# EAGLE board RespeakerCorev1.0_BRD (EAGLE 7.3.0), part 1 of 2
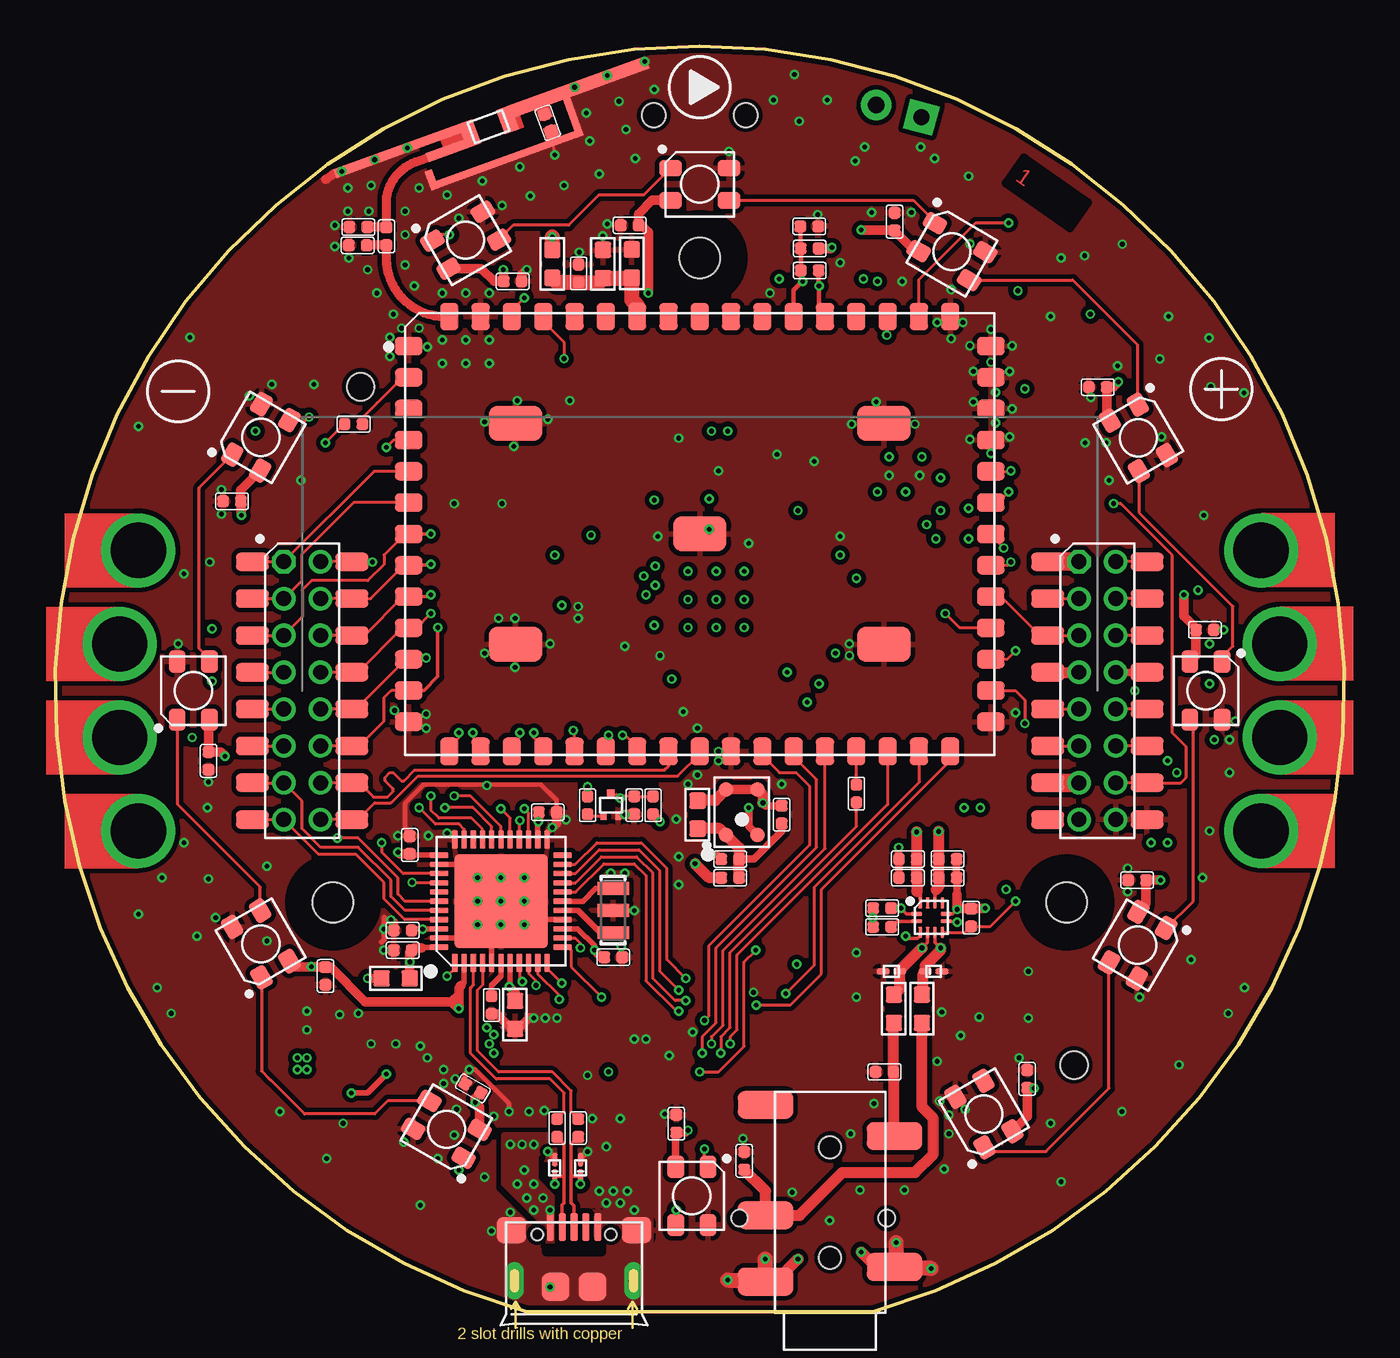
[diagram p0: board, top side]
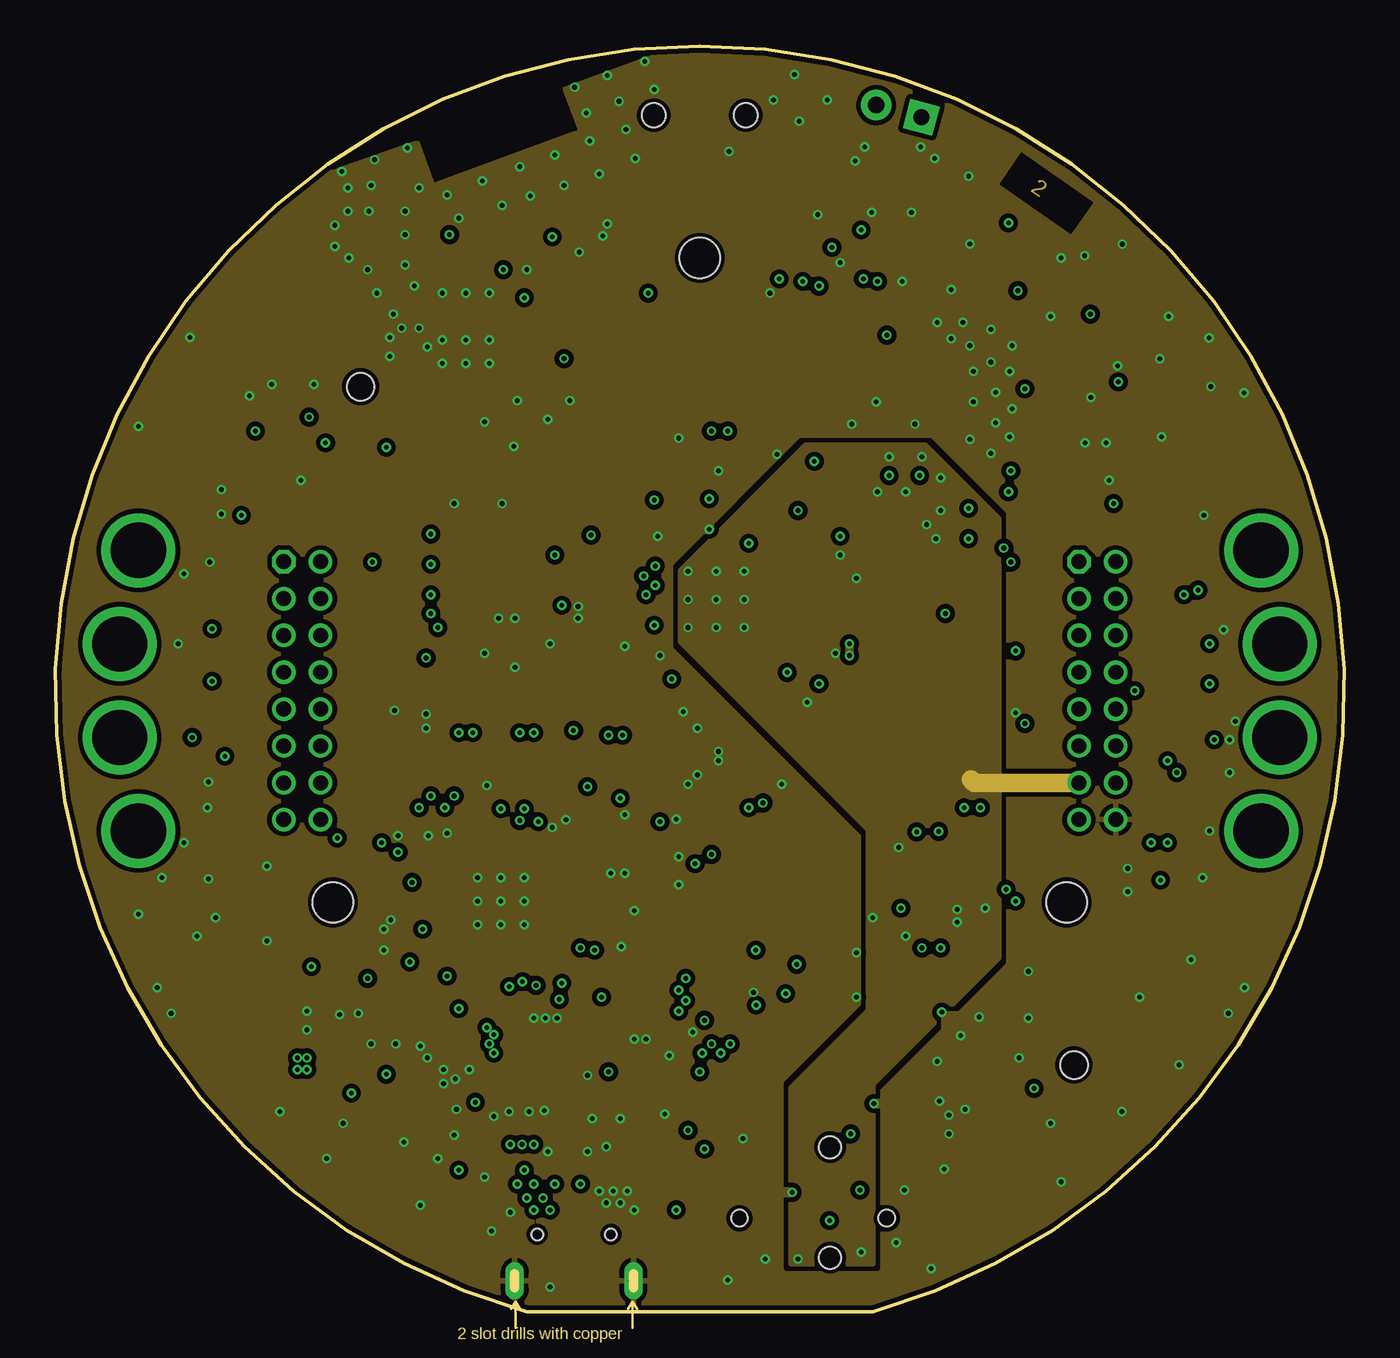
[diagram p1: board, inner layer GND]
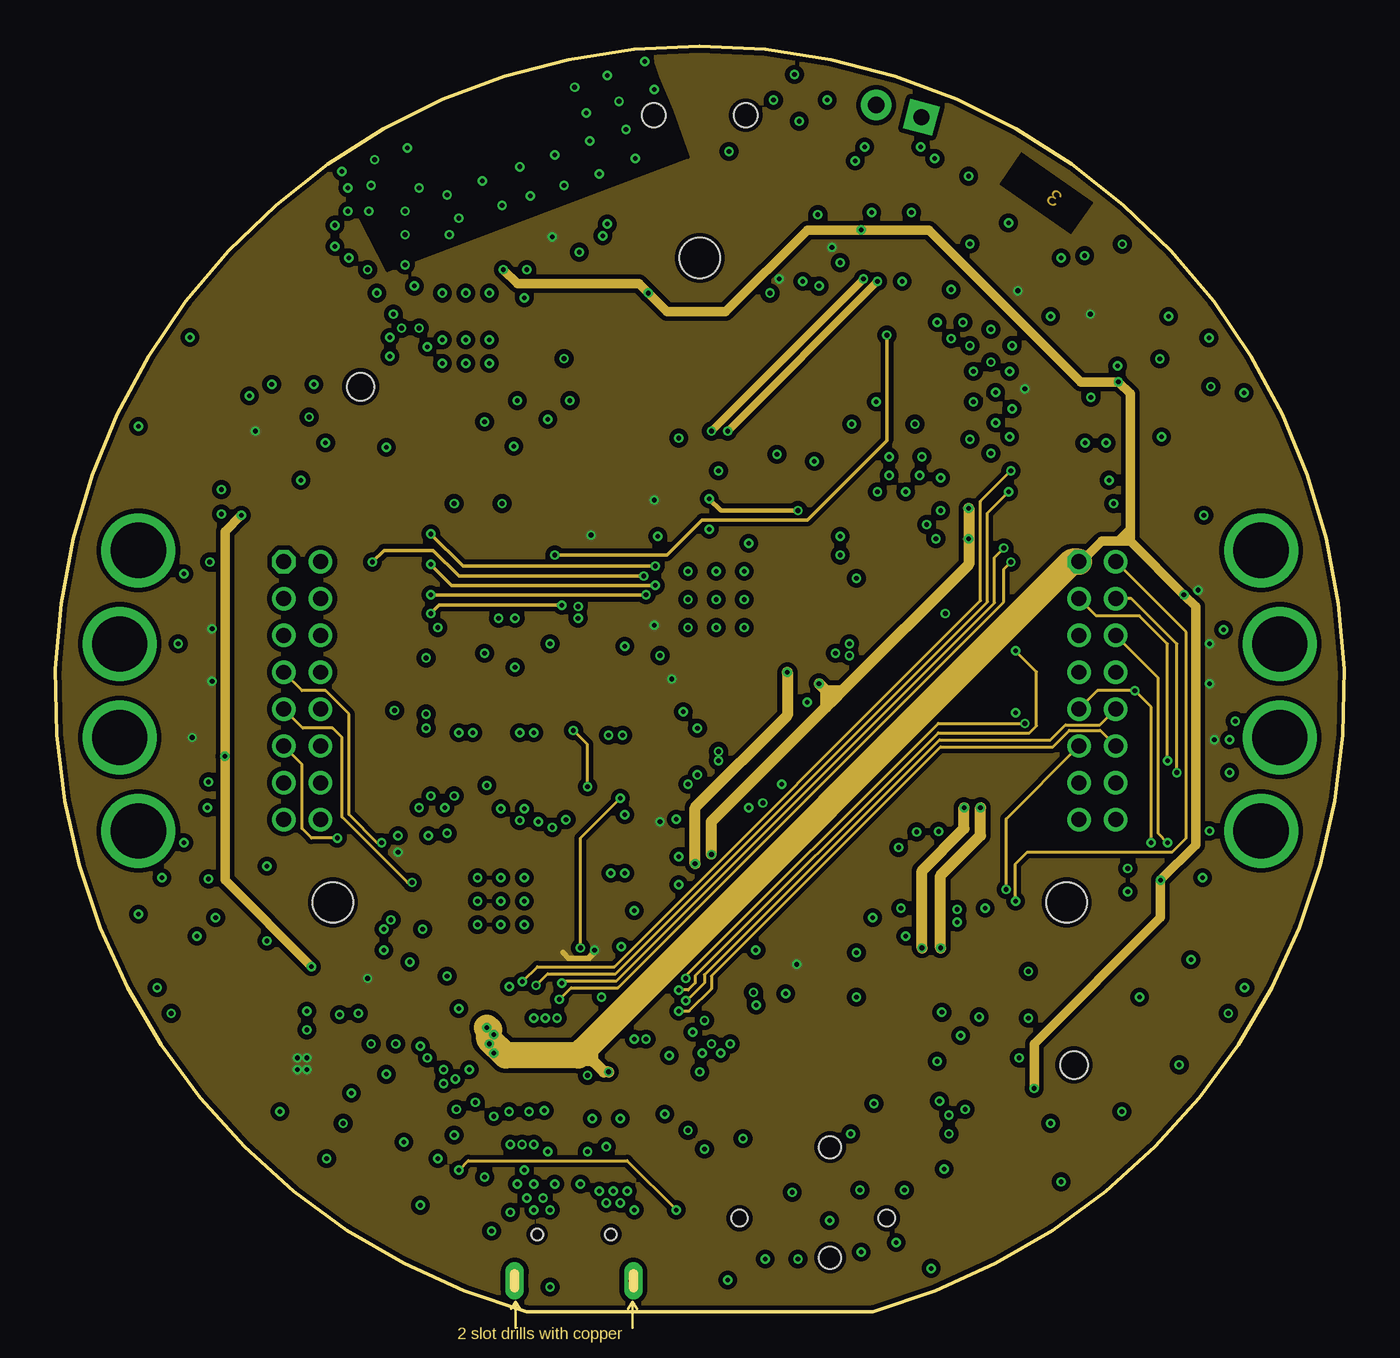
[diagram p2: board, inner layer PWR]
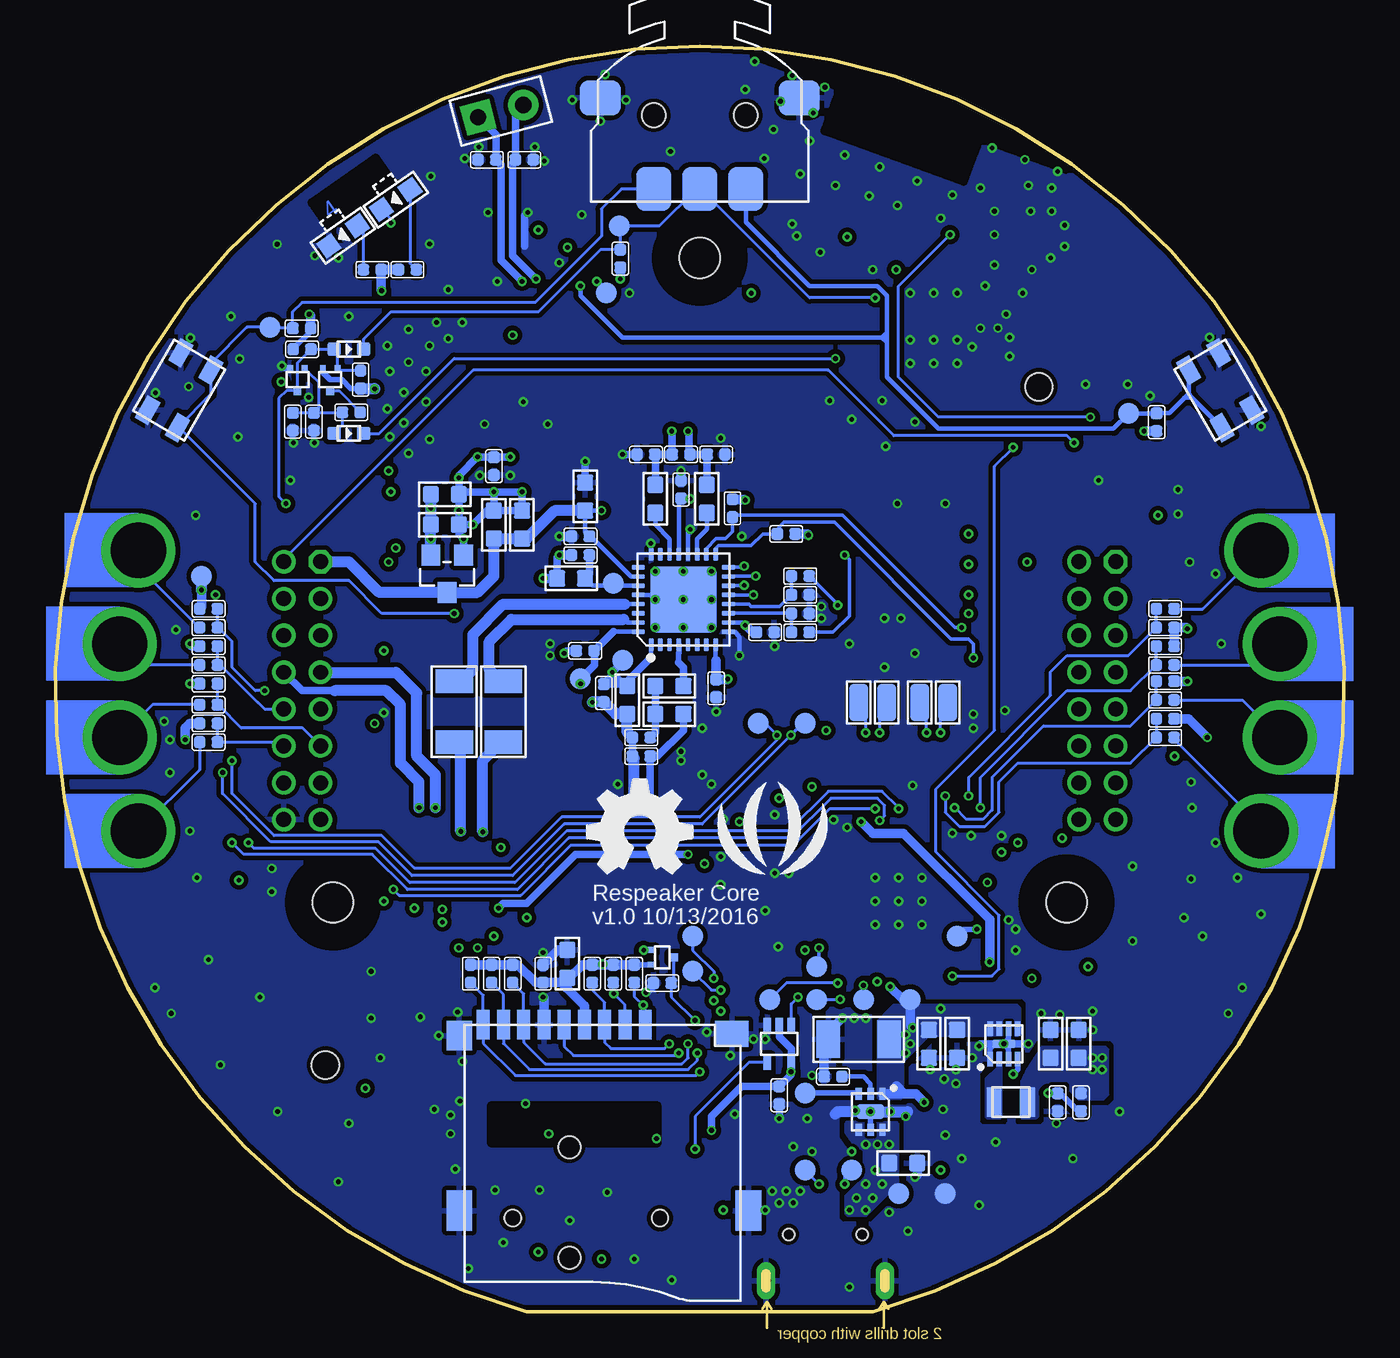
[diagram p3: board, bottom side, seen from below]

Size 69.97 x 68.72 mm. Coordinates in mm from the lower left corner, seen from the top.
Outline: 25.59,0 44.38,0 arc329 25.59,0
Copper layers (1*2*15*16): Top 0.035mm / dielectric 0.2mm / GND 0.0175mm / dielectric 0.3mm / PWR 0.0175mm / dielectric 0.2mm / Bottom 0.035mm
Design rules "SeeedStudio_4layer_DRU_no_angle_20140221 *": minimum track width 1mil, minimum drill 10mil, track to track 6mil, track to pad 6mil, pad to pad 6mil, via to via 6mil, smd to smd 0mil, copper to edge 10mil, drill to drill 8mil, minimum pad ring 6mil, minimum via ring 4mil, stop-mask expansion 4mil, vias tented up to drill 25mil, thermal gap 10mil
Holes 2.2 mm at 15.07,22.22 34.98,57.22 54.9,22.22
Holes 1.5 mm at 16.57,50.23 55.3,13.4
tRestrict: area 32.6,54.9 to 37.3,59.6; area 12.7,19.9 to 17.4,24.6; area 52.6,19.9 to 57.3,24.6; area 51.6,58.9 to 56,62.6
bRestrict: area 32.6,54.9 to 37.3,59.6; area 12.7,19.9 to 17.4,24.6; area 52.6,19.9 to 57.3,24.6; area 51.6,58.9 to 56,62.6; area 17.8,10.7 to 18.2,11.9

## Footprints (pad centres in the part's own frame; a part is rotated, then mirrored left to right if it is on the bottom)
ANT2P-SMD-3.5X1.4MM-BOTTOM = smd 3 x 0.5: ANT -2.5,-0.45 | smd 0.72 x 0.4: C$1 2.8,-0.48; C$2 2.8,-1.32; P$3 2.8,-1.67 | smd 0.8 x 1.4: CHIP1 0.8,0; CHIP2 -1.4,0 | smd 8.4 x 0.4: G$1 0,-2 | smd 0.4 x 2.6: G$2 4.2,-0.9 | smd 0.4 x 1.1: G$4 -4.2,-1.65 | smd 8 x 0.7: GND1 5,0.35 | smd 8 x 0.5: GND2 -5,0.45
BUTTON3+2P-SMD-11.8X11.8X2.5MM = smd 1.9 x 2.4: 1 -2.5,0.7; 2 0,0.7; 3 2.5,0.7 | smd 2.2 x 1.9: 4 5.4,5.65; 5 -5.4,5.65 | hole 1.3: -2.5,4.7; 2.5,4.7
C0402 = smd 0.635 x 0.635: 1 0,0.484; 2 0,-0.484
C0603 = smd 0.889 x 0.889: 1 0,0.762; 2 0,-0.762
C1206 = smd 1.27 x 2.032: 1 -1.651,0; 2 1.651,0
LED4-SMD-3.5X3.7MM = smd 1.2 x 0.9: 1 -1.58,0.875; 2 -1.58,-0.875; 3 1.58,-0.875; 4 1.58,0.875
SOD-923 = smd 0.7 x 0.3: 1 -0.45,0; 2 0.45,0
LED-SIDE-VIEW-0603-RIGHT = smd 1 x 1: 1 0,-0.95; 2 0,0.95
SOD-523 = smd 0.762 x 0.7: + -0.8,0; - 0.8,0
L0603 = smd 0.889 x 0.889: 1 -0.762,0; 2 0.762,0
MICRO-USB5+4P-SMD-0.65-B = smd 0.381 x 1.524: 1 -1.3,-0.25; 2 -0.65,-0.25; 3 0,-0.25; 4 0.65,-0.25; 5 1.3,-0.25 | smd 1.6 x 1.397: S1 -3.4,-0.427; S6 3.4,-0.427 | drill 0.508 pad 1.016 long: S2 -3.226,-3.175; S5 3.226,-3.175 | smd 1.5 x 1.5: S3 -1,-3.5; S4 1,-3.5 | hole 0.635: -2,-0.65; 2,-0.65
AUDIO5P-14X5X4.4MM = smd 3 x 1.5: 2 -3.5,-11.6; 3 -3.5,-4.5; 4 3.5,-3.7; 5 3.5,-7.3; 6 3.5,-13.3 | hole 1.2: 0,-5; 0,-11
1P-DIP-6X4MM = drill 3 pad 4: 1 0,0
H2-2.54 = drill 0.889 pad 1.651 square: 1 0,1.27 | drill 0.889 pad 1.651: 2 0,-1.27
H2X8-SMD_DRILL-2.0 = smd 1.8 x 1: 1 -2.7,7; 2 2.7,7; 3 -2.7,5; 4 2.7,5; 5 -2.7,3; 6 2.7,3; 7 -2.7,1; 8 2.7,1; 9 -2.7,-1; 10 2.7,-1; 11 -2.7,-3; 12 2.7,-3; 13 -2.7,-5; 14 2.7,-5; 15 -2.7,-7; 16 2.7,-7 | drill 0.813 pad 1.27 octagon: P$1 -1,7 | drill 0.813 pad 1.27: P$2 1,7; P$3 -1,5; P$4 1,5; P$5 -1,3; P$6 1,3; P$7 -1,1; P$8 1,1; P$9 -1,-1; P$10 1,-1; P$11 -1,-3; P$12 1,-3; P$13 -1,-5; P$14 1,-5; P$15 -1,-7; P$16 1,-7
MICRO-SD9+4P-SMD-16.1X14.5X1.85MM = smd 1.6 x 0.7: 1 0,2.25; 2 0,1.15; 3 0,0.05; 4 0,-1.05; 5 0,-2.15; 6 0,-3.25; 7 0,-4.35; 8 0,-5.45; 9 0,-6.55 | smd 1.6 x 1.4: G1 0.6,-7.85 | smd 2.2 x 1.4: G2 10.1,-7.85; G3 10.1,7.85 | smd 1.4 x 1.8: G4 0.5,6.95 | hole 0.9: 10.5,-4.95; 10.5,3.05
SW4P-SMD-4.5X3.2X2.5MM = smd 1.4 x 0.8: 1 -1.8,-0.94; 2 1.8,-0.94; 3 1.8,0.94; 4 -1.8,0.94
L201610 = smd 0.8 x 1.6: 1 -0.9,0; 2 0.9,0
R0402 = smd 0.635 x 0.635: 1 0,0.484; 2 0,-0.484
MIC4-SMD-3.76X2.95MM = smd 0.8 x 0.8: 1 0.85,1.23; 2 0.85,-1.23; 3 -0.85,-1.23; 4 -0.85,1.23
SOT-723 = smd 0.32 x 0.4: 1 -0.4,-0.6; 2 0.4,-0.6 | smd 0.42 x 0.5: 3 0,0.6
TP-D45MIL = smd 1.143 x 1.143: T 0,0
TP-80X40MIL = smd 2.032 x 1.016: 1 0,0
DFN6G-0.65-2X2MM = smd 0.65 x 0.35: 1 -0.975,0.65; 2 -0.975,0; 3 -0.975,-0.65; 4 0.975,-0.65; 5 0.975,0; 6 0.975,0.65 | smd 0.8 x 1.5: PAD 0,0
DFN8G-0.5-2X2MM = smd 0.8 x 0.3: 1 -0.827,0.75; 2 -0.827,0.25; 3 -0.827,-0.25; 4 -0.827,-0.75; 5 0.827,-0.75; 6 0.827,-0.25; 7 0.827,0.25; 8 0.827,0.75 | smd 0.45 x 1.3: 9 0,0
SOT-353 = smd 0.4 x 0.8: 1 -0.65,-1; 2 0,-1; 3 0.65,-1; 4 0.65,1; 5 -0.65,1
SOT-23 = smd 1.016 x 1.143: 1 -0.889,-1.016; 2 0.889,-1.016; 3 0,1.016
QFN32G-0.5-5X5MM = smd 0.7 x 0.25: 1 -2.45,1.75; 2 -2.45,1.25; 3 -2.45,0.75; 4 -2.45,0.25; 5 -2.45,-0.25; 6 -2.45,-0.75; 7 -2.45,-1.25; 8 -2.45,-1.75; 17 2.45,-1.75; 18 2.45,-1.25; 19 2.45,-0.75; 20 2.45,-0.25; 21 2.45,0.25; 22 2.45,0.75; 23 2.45,1.25; 24 2.45,1.75 | smd 0.25 x 0.7: 9 -1.75,-2.45; 10 -1.25,-2.45; 11 -0.75,-2.45; 12 -0.25,-2.45; 13 0.25,-2.45; 14 0.75,-2.45; 15 1.25,-2.45; 16 1.75,-2.45; 25 1.75,2.45; 26 1.25,2.45; 27 0.75,2.45; 28 0.25,2.45; 29 -0.25,2.45; 30 -0.75,2.45; 31 -1.25,2.45; 32 -1.75,2.45 | smd 3.6 x 3.6: 33 0,0
LGA65-1.7-24X32X1.8MM = smd 1.5 x 1: 1 -15.8,10.2; 2 -15.8,8.5; 3 -15.8,6.8; 4 -15.8,5.1; 5 -15.8,3.4; 6 -15.8,1.7; 7 -15.8,0; 8 -15.8,-1.7; 9 -15.8,-3.4; 10 -15.8,-5.1; 11 -15.8,-6.8; 12 -15.8,-8.5; 13 -15.8,-10.2; 31 15.8,-10.2; 32 15.8,-8.5; 33 15.8,-6.8; 34 15.8,-5.1; 35 15.8,-3.4; 36 15.8,-1.7; 37 15.8,0; 38 15.8,1.7; 39 15.8,3.4; 40 15.8,5.1; 41 15.8,6.8; 42 15.8,8.5; 43 15.8,10.2 | smd 1 x 1.5: 14 -13.6,-11.8; 15 -11.9,-11.8; 16 -10.2,-11.8; 17 -8.5,-11.8; 18 -6.8,-11.8; 19 -5.1,-11.8; 20 -3.4,-11.8; 21 -1.7,-11.8; 22 0,-11.8; 23 1.7,-11.8; 24 3.4,-11.8; 25 5.1,-11.8; 26 6.8,-11.8; 27 8.5,-11.8; 28 10.2,-11.8; 29 11.9,-11.8; 30 13.6,-11.8; 44 13.6,11.8; 45 11.9,11.8; 46 10.2,11.8; 47 8.5,11.8; 48 6.8,11.8; 49 5.1,11.8; 50 3.4,11.8; 51 1.7,11.8; 52 0,11.8; 53 -1.7,11.8; 54 -3.4,11.8; 55 -5.1,11.8; 56 -6.8,11.8; 57 -8.5,11.8; 58 -10.2,11.8; 59 -11.9,11.8; 60 -13.6,11.8 | smd 2.9 x 1.9: 61 10,6; 62 -10,6; 63 -10,-6; 64 10,-6; 65 0,0
VQFN-44 = smd 1 x 0.3: 1 -3.35,2.5; 2 -3.35,2; 3 -3.35,1.5; 4 -3.35,1; 5 -3.35,0.5; 6 -3.35,0; 7 -3.35,-0.5; 8 -3.35,-1; 9 -3.35,-1.5; 10 -3.35,-2; 11 -3.35,-2.5; 23 3.35,-2.5; 24 3.35,-2; 25 3.35,-1.5; 26 3.35,-1; 27 3.35,-0.5; 28 3.35,0; 29 3.35,0.5; 30 3.35,1; 31 3.35,1.5; 32 3.35,2; 33 3.35,2.5 | smd 0.3 x 1: 12 -2.5,-3.35; 13 -2,-3.35; 14 -1.5,-3.35; 15 -1,-3.35; 16 -0.5,-3.35; 17 0,-3.35; 18 0.5,-3.35; 19 1,-3.35; 20 1.5,-3.35; 21 2,-3.35; 22 2.5,-3.35; 34 2.5,3.35; 35 2,3.35; 36 1.5,3.35; 37 1,3.35; 38 0.5,3.35; 39 0,3.35; 40 -0.5,3.35; 41 -1,3.35; 42 -1.5,3.35; 43 -2,3.35; 44 -2.5,3.35 | smd 5.08 x 5.08: TAB 0,0
LEAD12P-SMD-0.4-1.8X1.8X0.5MM = smd 0.6 x 0.2: 1 -0.8,0.2; 2 -0.8,-0.2; 7 0.8,-0.2; 8 0.8,0.2 | smd 0.2 x 0.6: 3 -0.6,-0.8; 4 -0.2,-0.8; 5 0.2,-0.8; 6 0.6,-0.8; 9 0.6,0.8; 10 0.2,0.8; 11 -0.2,0.8; 12 -0.6,0.8
RESONATOR3-SMD-3.6X1.3X0.8MM = smd 0.7 x 1.7: 1 -1.2,0; 2 0,0; 3 1.2,0

## Placement (x,y rotation side)
ANT1  [ANT2P-SMD-3.5X1.4MM-BOTTOM]  23.8,64.45 20 top
BUTTON1  [BUTTON3+2P-SMD-11.8X11.8X2.5MM]  34.98,60.26 0 bottom
C1  100nF  [C0402]  45.56,59.19 0 top
C2  100nF  [C0402]  31.43,27.5 180 top
C3  100nF  [C0402]  56.59,50.2 90 top
C4  100nF  [C0402]  62.42,37.02 270 top
C5  10uF  [C0603]  23.94,8.06 270 bottom
C6  10uF  [C0603]  21.01,14.54 180 bottom
C7  10uF  [C0603]  22.54,14.54 180 bottom
C8  10uF  [C0603]  14.41,14.54 0 bottom
C9  10uF  [C0603]  15.93,14.54 0 bottom
C10  100uF 10V  [C1206]  26.35,14.8 0 bottom
C11  100nF  [C0402]  58.73,23.43 90 top
C12  100nF  [C0402]  52.76,12.64 0 top
C13  10uF  [C0603]  44.64,42.74 0 bottom
C14  10uF  [C0603]  46.16,42.74 0 bottom
C15  10uF  [C0603]  48.83,42.74 270 bottom
C16  10uF  [C0603]  48.83,44.39 270 bottom
C17  100nF  [C0402]  33.71,10.21 0 top
C18  10uF  [C0603]  34.86,26.99 0 top
C19  100nF  [C0402]  57.08,48.32 180 bottom
C20  33pF  [C0402]  29.52,38.93 270 bottom
C22  100nF  [C0402]  31.43,36.89 270 bottom
C23  100nF  [C0402]  34.1,33.85 180 bottom
C24  100nF  [C0402]  41.21,35.88 90 bottom
C25  100uF 10V  [C1206]  48.32,32.58 270 bottom
C26  100uF 10V  [C1206]  45.65,32.58 270 bottom
C27  100nF  [C0402]  53.4,50.61 0 bottom
C28  100pF  [C0402]  46.29,24.57 90 top
C29  100pF  [C0402]  48.45,24.57 270 top
C31  680nF DNP  [C0402]  36,46.55 90 bottom
C32  100pF  [C0402]  34.1,46.55 270 bottom
C33  100pF  [C0402]  37.91,46.55 90 bottom
C34  100pF  [C0402]  44.51,62.55 270 bottom
C35  100pF  [C0402]  46.54,62.55 90 bottom
C36  10uF  [C0603]  36.64,33.97 90 bottom
C37  100nF  [C0402]  39.43,26.99 0 top
C38  33pF  [C0402]  38.16,30.16 90 bottom
C39  33pF  [C0402]  38.16,31.18 90 bottom
C41  100nF  [C0402]  22.67,12.13 60 top
C42  100nF  [C0402]  14.66,18.22 180 top
C43  100nF  [C0402]  8.31,29.91 180 top
C44  100nF  [C0402]  9.58,44.01 90 top
C45  100nF  [C0402]  24.82,55.94 270 top
C46  100nF  [C0402]  31.17,58.99 90 top
C48  100nF  [C0402]  30.67,11.75 180 bottom
C49  10uF  [C0603]  41.21,44.26 180 bottom
C50  100nF  [C0402]  36,44.64 0 bottom
C51  100nF  [C0402]  41.46,42.1 90 bottom
C52  10uF  [C0603]  38.92,33.21 0 bottom
C53  100nF  [C0402]  40.19,33.59 180 bottom
C54  10uF  [C0603]  41.97,39.81 270 bottom
C55  100nF  [C0402]  41.46,41.08 90 bottom
C56  10uF  [C0603]  42.18,18.88 180 bottom
C57  1uF  [C0402]  43.49,18.35 180 bottom
C58  10uF  [C0603]  29.73,56.88 180 top
C59  10uF  [C0603]  31.29,56.91 180 top
C60  100nF  [C0402]  28.41,56.37 0 top
C61  1uF  [C0402]  40.93,58.93 270 top
C62  1uF  [C0402]  23.68,16.65 180 top
C63  100nF  [C0402]  30.29,19.24 270 top
C64  100nF  [C0402]  19.24,25.34 0 top
C65  100nF  [C0402]  26.73,27.11 270 top
C66  100nF  [C0402]  18.86,19.62 90 top
C67  100nF  [C0402]  18.86,20.7 90 top
C68  100nF  [C0402]  44.89,20.89 90 top
C69  100nF  [C0402]  44.89,21.91 90 top
C71  33pF  [C0402]  37.4,8.19 0 top
C72  33pF  [C0402]  45.02,13.02 90 top
C74  10uF  [C0603]  24.95,16.12 0 top
C75  33pF  [C0402]  29.52,37.91 270 bottom
D1  SK6812  [LED4-SMD-3.5X3.7MM]  48.68,57.56 150 top
D2  SK6812  [LED4-SMD-3.5X3.7MM]  58.8,47.45 120 top
D3  SK6812  [LED4-SMD-3.5X3.7MM]  62.47,33.72 90 top
D4  SK6812  [LED4-SMD-3.5X3.7MM]  58.76,19.9 60 top
D5  SK6812  [LED4-SMD-3.5X3.7MM]  50.42,10.73 300 top
D6  DF2S6.8FS  [SOD-923]  28.51,7.81 90 top
D7  DF2S6.8FS  [SOD-923]  27.11,7.81 90 top
D8  SK6812  [LED4-SMD-3.5X3.7MM]  34.55,6.29 90 top
D9  SK6812  [LED4-SMD-3.5X3.7MM]  21.23,9.9 330 top
D10  SK6812  [LED4-SMD-3.5X3.7MM]  11.15,19.96 300 top
D11  Green  [LED-SIDE-VIEW-0603-RIGHT]  54.35,58.42 125 bottom
D12  Red  [LED-SIDE-VIEW-0603-RIGHT]  51.49,60.39 125 bottom
D13  SK6812  [LED4-SMD-3.5X3.7MM]  7.49,33.72 270 top
D14  SK6812  [LED4-SMD-3.5X3.7MM]  11.15,47.47 240 top
D15  DF2S6.8FS  [SOD-923]  45.4,18.48 180 top
D16  DF2S6.8FS  [SOD-923]  47.68,18.48 0 top
D18  SK6812  [LED4-SMD-3.5X3.7MM]  22.27,58.19 210 top
D19  SK6812  [LED4-SMD-3.5X3.7MM]  34.98,61.22 180 top
D20  1N4148WT  [SOD-523]  54.03,52.26 0 bottom
D21  1N4148WT  [SOD-523]  54.03,47.69 0 bottom
FB1  120R 500mA  [L0603]  26.98,56.9 270 top
FB2  120R-500mA  [L0603]  18.47,18.1 0 top
FR1  [SEEEDSTUDIO-PCB-FRAME]  82.74,13.4 0 top  (outside the outline)
FR2  [SEEEDSTUDIO-PCB-FRAME]  83.63,42.74 0 top  (outside the outline)
FR3  [SEEEDSTUDIO-PCB-FRAME]  82.48,28.64 0 top  (outside the outline)
FR4  [SEEEDSTUDIO-PCB-FRAME]  84.77,49.85 0 top  (outside the outline)
FR5  [SEEEDSTUDIO-PCB-FRAME]  84.51,34.99 0 top  (outside the outline)
FR7  [SEEEDSTUDIO-PCB-FRAME]  83.5,21.78 0 top  (outside the outline)
J1  MICRO-USB  [MICRO-USB5+4P-SMD-0.65-B]  28.16,4.85 0 top
J2  PJ327-327  [AUDIO5P-14X5X4.4MM]  42.06,-2.07 180 top
J3  [1P-DIP-6X4MM]  65.46,41.34 90 top
J4  DNP  [H2-2.54]  45.79,65.19 105 bottom
J5  EH  [H2X8-SMD_DRILL-2.0]  13.39,33.72 0 top
J6  [H2X8-SMD_DRILL-2.0]  56.57,33.72 0 top
J7  [MICRO-SD9+4P-SMD-16.1X14.5X1.85MM]  40.19,15.58 270 bottom
J8  [1P-DIP-6X4MM]  66.48,36.26 90 top
J9  [1P-DIP-6X4MM]  66.48,31.18 90 top
J10  [1P-DIP-6X4MM]  65.46,26.1 90 top
J11  [1P-DIP-6X4MM]  4.5,26.1 270 top
J12  [1P-DIP-6X4MM]  3.49,31.18 270 top
J13  [1P-DIP-6X4MM]  3.49,36.26 270 top
J14  [1P-DIP-6X4MM]  4.5,41.34 270 top
K1  [SW4P-SMD-4.5X3.2X2.5MM]  6.72,50.04 300 bottom
K2  [SW4P-SMD-4.5X3.2X2.5MM]  63.25,50.04 60 bottom
L1  0.47uH  [L201610]  18.09,11.37 0 bottom
L2  BLM18BD252SN1  [L0603]  47.05,16.45 270 top
L4  BLM18BD252SN1  [L0603]  45.53,16.45 270 top
L6  BLM18BD252SN1  [L0603]  37.4,44.13 90 bottom
L7  BLM18BD252SN1  [L0603]  34.6,44.13 90 bottom
L8  BLM18BD252SN1  [L0603]  36.64,32.45 180 bottom
LC1  6.8nH  [R0402]  16.45,58.89 90 top
LC2  1.5pF  [R0402]  16.41,57.9 90 top
LC3  1.6pF  [R0402]  17.98,58.4 0 top
LC4  dnp  [R0402]  26.73,64.55 20 top
MIC1  SAO-3729-M-42-008  [MIC4-SMD-3.76X2.95MM]  37.27,27.11 180 top
Q1  CJ3134K  [SOT-723]  30.16,27.5 0 top
Q2  CJ3139K  [SOT-723]  37.02,19.24 270 bottom
Q3  CJ3139K  [SOT-723]  55.05,50.61 180 bottom
Q4  CJ3134K  [SOT-723]  56.83,50.61 180 bottom
R1  10k  [R0402]  32.44,27.5 0 top
R2  1k  [R0402]  28.89,27.5 180 top
R3  100k_1%  [R0402]  55.94,48.32 0 bottom
R4  10k dnp  [R0402]  56.57,52.26 270 bottom
R5  100k_1%  [R0402]  14.28,11.37 180 bottom
R6  22K_1%  [R0402]  27.75,12.76 90 bottom
R7  22K_1%  [R0402]  15.55,11.37 180 bottom
R8  10M  [R0402]  61.65,31.94 270 bottom
R9  22R  [R0402]  27.24,9.97 0 top
R10  22R  [R0402]  28.38,9.97 0 top
R11  10k  [R0402]  39.29,57.18 0 bottom
R12  1k  [R0402]  52.76,56.58 90 bottom
R13  10M  [R0402]  9.71,32.19 90 bottom
R14  10M  [R0402]  9.71,34.23 90 bottom
R15  10M  [R0402]  9.71,36.13 90 bottom
R16  10M  [R0402]  9.71,37.15 90 bottom
R17  1k  [R0402]  50.86,56.58 270 bottom
R18  33R  [R0402]  9.71,38.16 90 bottom
R19  33R  [R0402]  61.65,30.92 270 bottom
R20  33R  [R0402]  9.71,35.12 90 bottom
R21  33R  [R0402]  9.71,33.21 90 bottom
R22  1k  [R0402]  10.18,48.3 0 bottom
R23  33R  [R0402]  9.71,31.18 90 bottom
R24  10k  [R0402]  47.43,18.35 180 bottom
R25  10k  [R0402]  46.29,18.35 180 bottom
R26  10k  [R0402]  45.14,18.35 180 bottom
R27  10k  [R0402]  40.83,18.35 180 bottom
R28  10k  [R0402]  39.68,18.35 180 bottom
R29  10k  [R0402]  38.54,18.35 180 bottom
R30  10k  [R0402]  46.29,23.56 90 top
R31  10k  [R0402]  48.45,23.56 270 top
R32  22R  [R0402]  43.49,28.13 180 top
R33  10k  [R0402]  56.6,53.4 90 bottom
R34  0R  [R0402]  46.16,45.91 180 bottom
R35  10M  [R0402]  61.65,34.1 270 bottom
R36  33R  [R0402]  61.65,32.96 270 bottom
R37  10M  [R0402]  61.65,36.13 270 bottom
R38  10k  [R0402]  33.21,43.62 180 bottom
R39  10k  [R0402]  30.29,42.23 90 bottom
R40  22R  [R0402]  29.52,39.94 90 bottom
R41  33R  [R0402]  61.65,35.12 270 bottom
R42  10M  [R0402]  61.65,38.16 270 bottom
R43  33R  [R0402]  61.65,37.15 270 bottom
R46  100k_1%  [R0402]  53.91,48.83 270 bottom
R47  2.2k  [R0402]  49.72,21.4 0 top
R48  0R  [R0402]  16.19,48.2 270 top
R49  22R  [R0402]  29.52,36.89 90 bottom
R53  10k  [R0402]  40.95,57.73 90 top
R55  0R DNP  [R0402]  40.96,56.53 90 top
R56  10k  [R0402]  37.02,17.84 90 bottom
R57  0R  [R0402]  36.64,23.56 90 top
R58  0R DNP  [R0402]  36.64,24.57 90 top
TP1  [TP-D45MIL]  23.55,16.95 180 bottom
TP2  [TP-D45MIL]  62.04,39.94 180 bottom
TP3  [TP-D45MIL]  24.19,6.41 180 bottom
TP4  [TP-D45MIL]  41.46,34.35 180 bottom
TP5  [TP-D45MIL]  26.09,16.95 270 bottom
TP6  [TP-D45MIL]  39.35,58.96 158 bottom
TP7  [TP-D45MIL]  28.63,16.95 270 bottom
TP8  [TP-D45MIL]  31.17,16.95 270 bottom
TP9  [TP-80X40MIL]  21.52,33.08 270 bottom
TP10  [TP-80X40MIL]  23.05,33.08 270 bottom
TP11  [TP-80X40MIL]  24.82,33.08 270 bottom
TP12  [TP-D45MIL]  11.69,48.77 60 bottom
TP13  [TP-D45MIL]  39.18,35.37 180 bottom
TP14  [TP-D45MIL]  39.68,39.56 180 bottom
TP15  [TP-D45MIL]  58.33,53.45 188 bottom
TP16  [TP-D45MIL]  29.27,31.94 180 bottom
TP17  [TP-D45MIL]  31.81,31.94 180 bottom
TP18  [TP-D45MIL]  21.65,6.41 0 bottom
TP19  [TP-D45MIL]  26.73,7.68 0 bottom
TP20  [TP-D45MIL]  29.27,7.68 0 bottom
TP21  [TP-D45MIL]  29.27,11.87 0 bottom
TP22  [TP-80X40MIL]  26.35,33.08 270 bottom
TP23  [TP-D45MIL]  28.63,18.73 0 bottom
TP24  [TP-D45MIL]  35.37,18.48 180 bottom
TP25  [TP-D45MIL]  35.37,20.38 180 bottom
TP26  [TP-D45MIL]  40.06,55.31 0 bottom
TP27  [TP-D45MIL]  21.01,20.38 0 bottom
U1  ETA6020  [DFN6G-0.65-2X2MM]  25.71,10.86 270 bottom
U2  ETA3410  [DFN8G-0.5-2X2MM]  18.47,14.54 90 bottom
U3  74HC1G08  [SOT-353]  30.67,14.54 180 bottom
U4  AP7333  [SOT-23]  48.7,40.07 180 bottom
U5  WM8960  [QFN32G-0.5-5X5MM]  35.87,38.67 90 bottom
U6  AI7688H  [LGA65-1.7-24X32X1.8MM]  34.98,42.23 0 top
U7  ATMEGA32U4  [VQFN-44]  24.19,22.29 90 top
U8  FSA2275  [LEAD12P-SMD-0.4-1.8X1.8X0.5MM]  47.56,21.4 0 top
U$75  [OSHW_FILLX200_NOTEXT_TNAME]  41.08,23.81 0 bottom
U$76  [SEEED-SILK-TNAME-280*268MIL]  31.05,25.46 0 bottom
X3  16MHz-16pF-0.5%-40R  [RESONATOR3-SMD-3.6X1.3X0.8MM]  30.29,21.78 270 top

## Library data of the parts
ANT1 J1 J3-J6 J8-J14 MIC1 = Connector-new
BUTTON1 J2 U8 = template
C1-C20 C22-C29 C31-C39 C41-C46 C48-C69 C71 C72 C74 C75 D1-D16 D18-D21 FB1 FB2 K1 K2 L1 L2 L4 L6-L8 LC1-LC4 Q1-Q4 R1-R43 R46-R49 R53 R55-R58 TP9-TP11 TP22 X3 = Discrete-new
FR1-FR5 FR7 U6 = moudle-new
J7 = Connector-new; SKU: 320090000
TP1-TP8 TP12-TP21 TP23-TP27 = Discrete-new; PARTNO: DNP
U1-U5 U7 = IC-new
U$75 U$76 = Logo

## Nets
!PWR_ON: C27.1 D20.+ J6.14 J6.P$14 Q3.1 Q4.3 R4.1
AGND: C13.1 C14.1 C15.1 C16.1 C18.1 C24.1 C28.1 C29.1 C37.1 C38.1 C39.1 C52.2 C53.1 C54.2 C55.1 C68.1 C69.1 J2.3 J2.4 J6.13 J6.P$13 MIC1.2 MIC1.3 R30.1 R31.1 R34.2 R47.1 U4.1 U5.28 U5.33 U8.3 U8.7 U8.8
AVDD: C15.2 C16.2 C24.2 C69.2 R58.1 TP4.T U4.2 U5.32 U8.1
GND: ANT1.G$1 ANT1.G$2 ANT1.G$4 ANT1.GND1 ANT1.GND2 BUTTON1.4 BUTTON1.5 C1.1 C2.1 C3.1 C4.1 C5.1 C6.1 C7.1 C8.1 C9.1 C10.1 C11.1 C12.1 C17.1 C19.1 C20.1 C22.1 C23.1 C32.1 C33.1 C34.1 C35.1 C41.1 C42.1 C43.1 C44.1 C45.1 C46.1 C48.1 C49.2 C50.1 C51.1 C56.2 C57.2 C58.2 C59.2 C60.1 C61.1 C62.1 C63.1 C64.1 C65.1 C66.1 C67.1 C71.1 C72.1 C74.2 C75.1 D1.2 D2.2 D3.2 D4.2 D5.2 D6.2 D7.2 D8.2 D9.2 D10.2 D11.2 D13.2 D14.2 D15.2 D16.2 D18.2 D19.2 J1.5 J1.S1 J1.S2 J1.S3 J1.S4 J1.S5 J1.S6 J6.16 J6.P$16 J7.6 J7.G1 J7.G2 J7.G3 J7.G4 K1.3 K1.4 K2.3 K2.4 LC1.1 LC2.1 LC4.1 LC4.2 Q1.2 Q4.2 R3.2 R6.1 R7.1 R34.1 R56.1 TP18.T U1.5 U1.PAD U2.1 U2.3 U2.6 U2.9 U3.3 U5.9 U5.20 U5.24 U6.1 U6.13 U6.23 U6.31 U6.40 U6.41 U6.42 U6.43 U6.44 U6.59 U6.61 U6.62 U6.63 U6.64 U6.65 U7.5 U7.15 U7.23 U7.33 U7.35 U7.43 U7.TAB X3.2
GPIO12/UART_TXD0: J6.4 J6.P$4 TP16.T U6.19
GPIO13/UART_RXD0: J6.3 J6.P$3 TP17.T U6.20
GPIO_0/I2S_ADC: J5.5 J5.P$5 U5.16 U6.7
GPIO_1/I2S_DAC: J5.4 J5.P$4 U5.14 U6.8
GPIO_2/I2S_LRCLK: J5.6 J5.P$6 U5.13 U6.9
GPIO_3/I2S_BCLK: J5.8 J5.P$8 R40.2 U6.10
GPIO_4/I2C_SCL: J5.10 J5.P$10 R39.1 U5.17 U6.11
GPIO_5/I2C_SDA: J5.12 J5.P$12 R38.1 U5.18 U6.12
GPIO_19/PWM_CH1: BUTTON1.1 K2.1 K2.2 R33.1 TP15.T U6.34
GPIO_40: D21.- U6.57
GPIO_41: R48.1 U6.2
GPIO_42: BUTTON1.2 D20.- R11.1 TP6.T U6.58
GPIO_45/UART_TXD1: J5.1 J5.P$1 U6.5
GPIO_46/UART_RXD1: J5.3 J5.P$3 U6.6
HP_L: D15.1 J6.7 J6.P$7 L4.1 U8.4
HP_R: D16.1 J6.8 J6.P$8 L2.1 U8.5
HP_SEL: J6.2 J6.P$2 R47.2 R48.2 U8.6
LIN1: C36.2 U5.4
MCLK_OUT: J5.2 J5.P$2 U5.15
MIC_VDD: C18.2 C37.2 MIC1.1 R57.2 R58.2
MICBIAS: C52.1 C53.2 R57.1 TP13.T U5.1
MT_GPIO0: R2.2 U6.18
MT_GPIO_14/SPIS_CS: U6.39 U7.8
MT_GPIO_18/PWM_CH0: J6.5 J6.P$5 U6.35
MT_GPIO_39: U6.4 U7.1
MT_GPIO_43: U6.3
MT_SPIS_CLK: TP5.T U6.38 U7.9
MT_SPIS_MISO: TP8.T U6.37 U7.11
MT_SPIS_MOSI: TP7.T U6.36 U7.10
MT_UART_RXD: TP25.T U6.32 U7.21
MT_UART_TXD: TP24.T U6.33 U7.20
N$1: Q3.3 R46.1
N$2: LC2.2 LC3.2 U6.60
N$3: D11.1 R12.1
N$4: C68.2 U8.2
N$5: C75.2 R49.1 U5.11
N$6: C38.2 L8.1 MIC1.4
N$7: D12.1 R17.1
N$8: R10.1 U7.4
N$9: J7.5 R32.1
N$10: R9.1 U7.3
N$11: D9.1 D10.3
N$12: R6.2 U1.2
N$13: D1.3 D19.1
N$14: L6.1 U5.22
N$15: D7.1 J1.2 R9.2 TP19.T
N$16: D6.1 J1.3 R10.2 TP20.T
N$18: D10.1 D13.3
N$19: D8.1 D9.3
N$20: J13.1 R20.2
N$21: C19.2 D21.+ Q4.1 R3.1 R46.2
N$22: J14.1 R18.2
N$23: D13.1 D14.3
N$24: C36.1 C39.2 L8.2
N$25: D14.1 D18.3
N$26: C20.2 R40.1 U5.12
N$27: TP9.1 U6.14
N$28: Q1.1 R2.1
N$29: L1.1 U2.2
N$30: D18.1 D19.3
N$31: J8.1 R41.2
N$32: R5.1 R7.2 U2.4
N$33: J12.1 R21.2
N$34: J11.1 R23.2
N$35: J3.1 R43.2
N$36: J9.1 R36.2
N$37: J10.1 R19.2
N$38: L7.1 U5.19
N$39: C31.1 C33.2 C35.2 J4.1 L6.2
N$40: C62.2 U7.6
N$41: C67.2 TP27.T U7.42
N$42: D1.1 D2.3
N$43 [none3]: C65.2 C66.2 FB2.2 U7.24 U7.44
N$44: D2.1 D3.3
N$45: D3.1 D4.3
N$46: D4.1 D5.3
N$47: C31.2 C32.2 C34.2 J4.2 L7.2
N$49: U7.17 X3.1
N$50: U7.16 X3.3
N$51: ANT1.ANT LC1.2 LC3.1
N$52: TP10.1 U6.15
N$53: TP11.1 U6.16
N$54: TP22.1 U6.17
N$57: C26.2 C28.2 R30.2 U8.12
N$58: C25.1 U5.29
N$59: D8.3 U3.4
N$60: C26.1 U5.31
N$61: C25.2 C29.2 R31.2 U8.10
N$63: C72.2 J2.2 L4.2
N$64: C71.2 J2.5 L2.2
PB4/A8/D8: R13.1 R23.1 U7.28
PB5/A9/D9: R14.1 R21.1 U7.29
PB6/A10/D10: R16.1 R18.1 U7.30
PB7/D11: U3.1 U7.12
PC7/D13: R15.1 R20.1 U7.32
PD0/SCL/D3: J6.12 J6.P$12 R8.1 R19.1 U7.18
PD1/SDA/D2: J6.10 J6.P$10 R37.1 R41.1 U7.19
PD4/A6/D4: J6.11 J6.P$11 R35.1 R36.1 U7.25
PD6/A11/D12: J6.6 J6.P$6 U7.26
PD7/A7/D6: J6.9 J6.P$9 R42.1 R43.1 U7.27
PF0/A5: J5.15 J5.P$15 U7.41
PF1/A4: J5.13 J5.P$13 U7.40
PF4/A3: J5.11 J5.P$11 U7.39
PF6/A1: J5.9 J5.P$9 U7.37
PF7/A0: J5.7 J5.P$7 U7.36
PORST_N: C61.2 R53.1 R55.1 TP26.T U6.49
PW_FAULT: TP21.T U1.3
REF_CLKO: R49.2 U6.46
RIN1: U5.5
RST_A: C2.2 Q1.3 R1.1 TP23.T U7.13
SD_CD: Q2.3 R56.2 U6.24
SD_CLK: R32.2 U6.27
SD_CMD: J7.3 R27.1 U6.28
SD_D0: J7.7 R26.1 U6.26
SD_D1: J7.8 R25.1 U6.25
SD_D2: J7.1 R29.1 U6.30
SD_D3: J7.2 R28.1 U6.29
SSSS: J7.9 Q2.1 R24.1
USB_5V: C5.2 J1.1 TP3.T U1.4 U1.6
USB_M: J5.16 J5.P$16 U6.22
USB_P: J5.14 J5.P$14 U6.21
VDD_3V3: C8.2 C9.2 C22.2 C23.2 C27.2 C56.1 C57.1 C63.2 C64.2 FB1.1 FB2.1 J7.4 L1.2 Q2.2 Q3.2 R1.2 R4.2 R5.2 R8.2 R11.2 R12.2 R13.2 R14.2 R15.2 R16.2 R17.2 R22.2 R24.2 R25.2 R26.2 R27.2 R28.2 R29.2 R33.2 R35.2 R37.2 R38.2 R39.2 R42.2 R53.2 TP2.T U5.8 U5.10 U7.14 U7.34
VDD_5V: C1.2 C3.2 C4.2 C6.2 C7.2 C10.2 C11.2 C12.2 C13.2 C14.2 C17.2 C41.2 C42.2 C43.2 C44.2 C45.2 C46.2 C48.2 C49.1 C50.2 C51.2 C74.1 D1.4 D2.4 D3.4 D4.4 D5.4 D8.4 D9.4 D10.4 D13.4 D14.4 D18.4 D19.4 J6.1 J6.P$1 TP1.T U1.1 U2.5 U2.7 U2.8 U3.2 U3.5 U4.3 U5.21 U5.26 U7.2 U7.7
VDD_7688: C58.1 C59.1 C60.2 FB1.2 U6.54
VMID: C54.1 C55.2 TP14.T U5.27
WDT_RST_N: BUTTON1.3 K1.1 K1.2 R22.1 R55.2 TP12.T U6.48
WLED_N: D12.2 U6.45